# Altium PCB S6_Komutator.PcbDoc
Units mm, origin at the board's own origin, x right, y up, seen from the top; angles counter-clockwise.
Board outline 22.9 x 17 mm, 2 copper layers (Top Layer, Bottom Layer); 5 components, 4 nets, 22 pads, 11 vias.
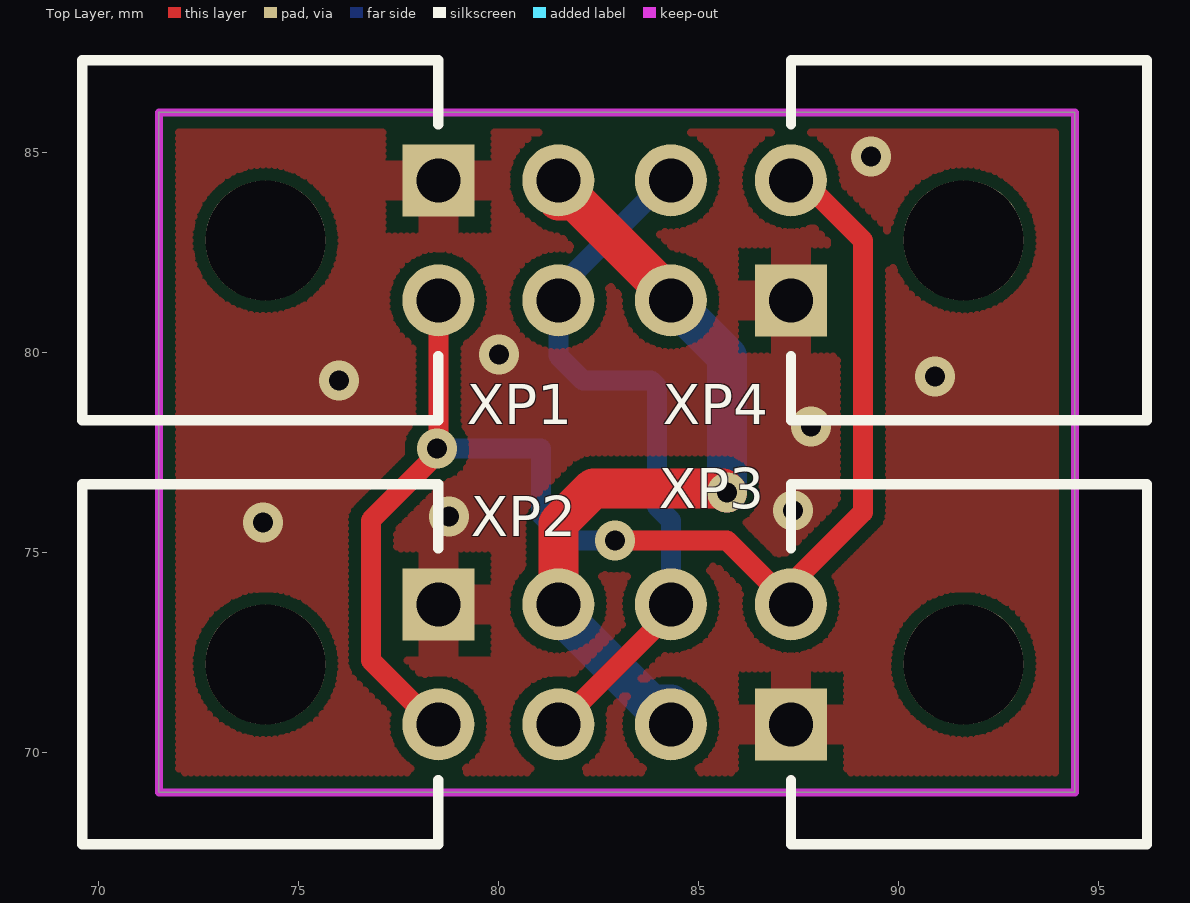
[diagram p0: Top Layer view]
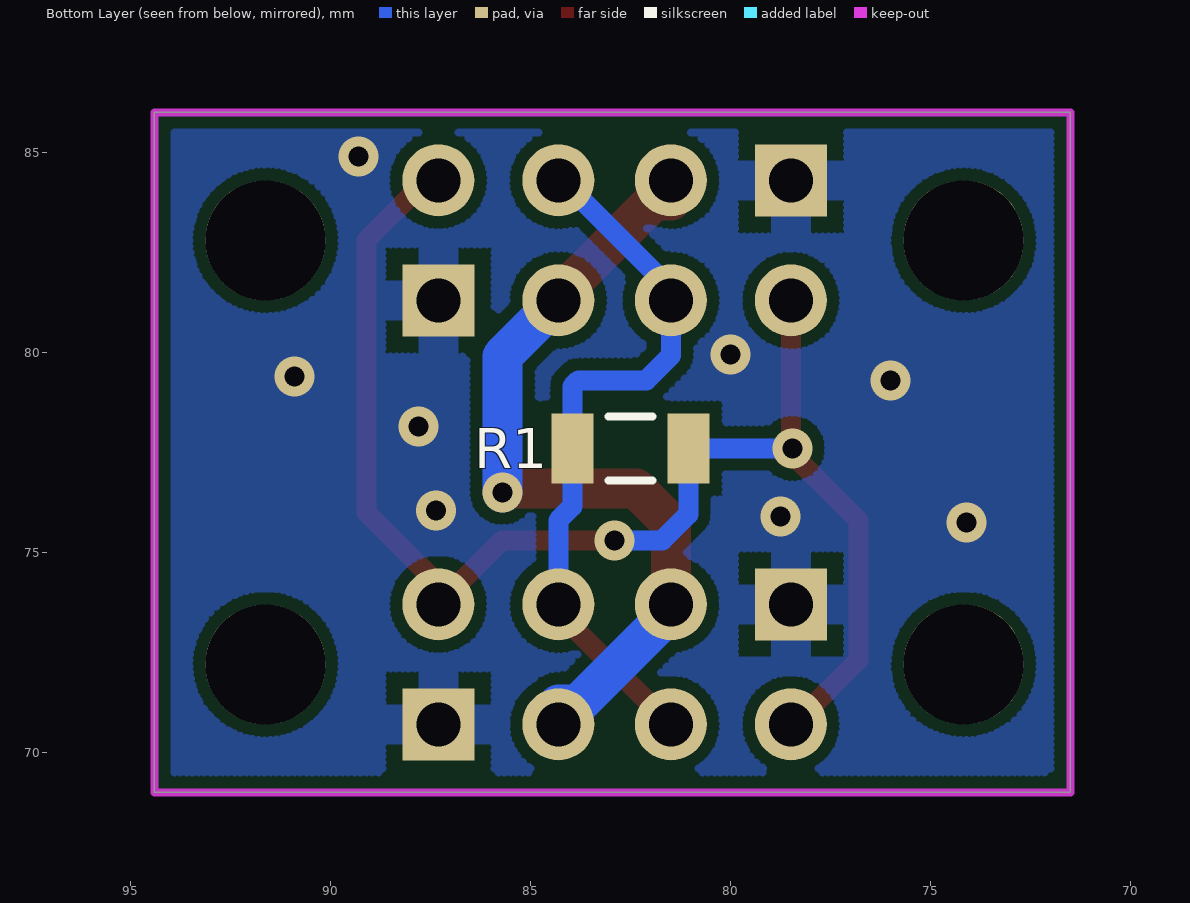
[diagram p1: Bottom Layer view, seen from below]

## Layer stack, top to bottom
Top Solder: solder mask 0.0102, Solder Resist, Dk 3.5
Top Layer: signal copper 0.0356
Dielectric 1: dielectric 0.32, FR-4, Dk 4.8
Bottom Layer: signal copper 0.0356
Bottom Solder: solder mask 0.0102, Solder Resist, Dk 3.5

## Board outline
71.5,69 71.5,86 94.4,86 94.4,69

## Design rules (kind name [scope] priority, off if disabled: settings)
Clearance [All] p1: gap=0.3
PolygonConnect PolygonConnect_1 [IsVia] p1: connectstyle=Direct reliefconductorwidth=0.254 reliefentries=4 polygonreliefangle="90 Angle" airgapwidth=0.254
PolygonConnect [All] p2: connectstyle=Relief reliefconductorwidth=1 reliefentries=4 polygonreliefangle="90 Angle" airgapwidth=0.4
RoutingVias [All] p1: holewidth=0.4 width=0.8 viastyle="Through Hole" minholewidth=0.3 minwidth=0.6 maxholewidth=0.5 maxwidth=1
SolderMaskExpansion [All] p1: expansion=0.102
Width [All] p1: maxlimit=1 minlimit=0.2 preferedwidth=0.5
30 further rules are at their usual default settings.

## Components (designator, comment, footprint, x,y, rotation, side; value= is the part's Value field where it differs from the comment)
R1 "120E" RC1206 82.5,77.6 r180 bottom
XP1 "MIF2X02PRP" MIF2X02PRP 78.486,84.3 r180 top
XP2 "MIF2X02PRP" MIF2X02PRP 78.486,73.7 r180 top
XP3 "MIF2X02PRP" MIF2X02PRP 87.3,70.7 r0 top
XP4 "MIF2X02PRP" MIF2X02PRP 87.3,81.3 r0 top

## Footprints (in the part's own frame and the unit in brackets; to place one, negate y for a bottom-side part, rotate by r counter-clockwise, add the part's x,y. Pads: shape width x height; smd on the part's side, far side on the other; paste and mask are expansions set on the pad)
MIF2X02PRP [mm]
  rect 1.8x1.8 hole 1.1: 1(0,0)
  round 1.8 hole 1.1: 2(0,3) 3(-3,0) 4(-3,3)
  round 3 hole 3 unplated: 5(4.32,1.5)
  silkscreen extent 0,-3 8.9,6
RC1206 [mm]
  rect 1.05x1.75 smd paste-25.4: 1(-1.45,0) 2(1.45,0)
  silkscreen extent -0.55,-0.8 0.55,0.8

## Part data
R1: library part RC1206, "RC1206"

## Via types
v1: diameter 1, hole 0.5, Top Layer to Bottom Layer, 11 vias

## Nets (pads, with @x,y where several pads share a name; then routed paths per layer and width w, separated by ;. In a path a pad name is that pad's centre, name@x,y a point inside that pad or via, vN(x,y) a via of type N, cw(c..) or ccw(c..) an arc to the next point about the centre after c; other vN are vias at no path point)
GND: XP1.1 XP2.1 XP3.1 XP4.1
  other v1: 74.1,75.75 78.75,75.9 87.355,76.05 87.8,78.15 76,79.3 90.9,79.4 80,79.95 89.3,84.9
NetR1_1: R1.1 XP1.4 XP2.4 XP3.4 XP4.4 | length 17.8
  Top Layer w0.5: XP2.4@81.486,71.2 82,71.2 XP3.4@84.45,73.65
  Bottom Layer w0.5: XP3.4 84.3,75.8 83.95,76.15 R1.1 83.95,79.15 83.8,79.3 82.1,79.3 81.486,79.914 XP1.4 81.486,81.586 83.7,83.8 XP4.4@84.3,83.8
NetR1_2: R1.2 XP1.2 XP2.2 XP3.2 XP4.2 | length 34.6
  Top Layer w0.5: XP2.2 78.4,70.7 76.8,72.3 76.8,75.8 v1@78.486,77.486 ; v1@78.486,77.6 XP1.2@78.486,80.8 ; v1(82.9,75.3) 85.7,75.3 XP3.2 ; XP3.2@87.3,74.2 89.1,76 89.1,82.8 87.6,84.3 XP4.2
  Bottom Layer w0.5: v1(78.45,77.6) R1.2 81.05,75.95 81.7,75.3 v1(82.9,75.3)
VIN: XP1.3 XP2.3 XP3.3 XP4.3 | length 19.6
  Top Layer w1: XP2.3 81.486,75.724 82.362,76.6 85.6,76.6 v1(85.7,76.5) ; XP1.3@81.486,83.8 81.9,83.8 XP4.3@84.3,81.4
  Bottom Layer w1: XP2.3@81.486,73.514 83.8,71.2 XP3.3@84.3,71.2 ; XP4.3 85.7,79.9 v1(85.7,76.5)
pads on no net: XP1.5 XP2.5 XP3.5 XP4.5

## Polygon pours and split planes (outlines as drawn)
GND on Top Layer "GND_L01_P000" (hatched 90Degree grid 0.15 track 0.2, remove dead copper, pour order 0): 69.6,87.3 96.2,87.3 96.2,67.7 69.6,67.7
GND on Bottom Layer "GND_L02_P002" (hatched 90Degree grid 0.15 track 0.2, remove dead copper, pour order 2): 69.6,87.3 96.2,87.3 96.2,67.7 69.6,67.7

## Keep-outs
Keep-Out Layer:
  the board outline again, w0.2